# Altium PCB led_RGB_esp32_pcb.PcbDoc
Units mm, origin at the board's own origin, x right, y up, seen from the top; angles counter-clockwise.
Board outline 80 x 35 mm, 2 copper layers (Top Layer, Bottom Layer); 37 components, 28 nets, 176 pads, 53 vias.
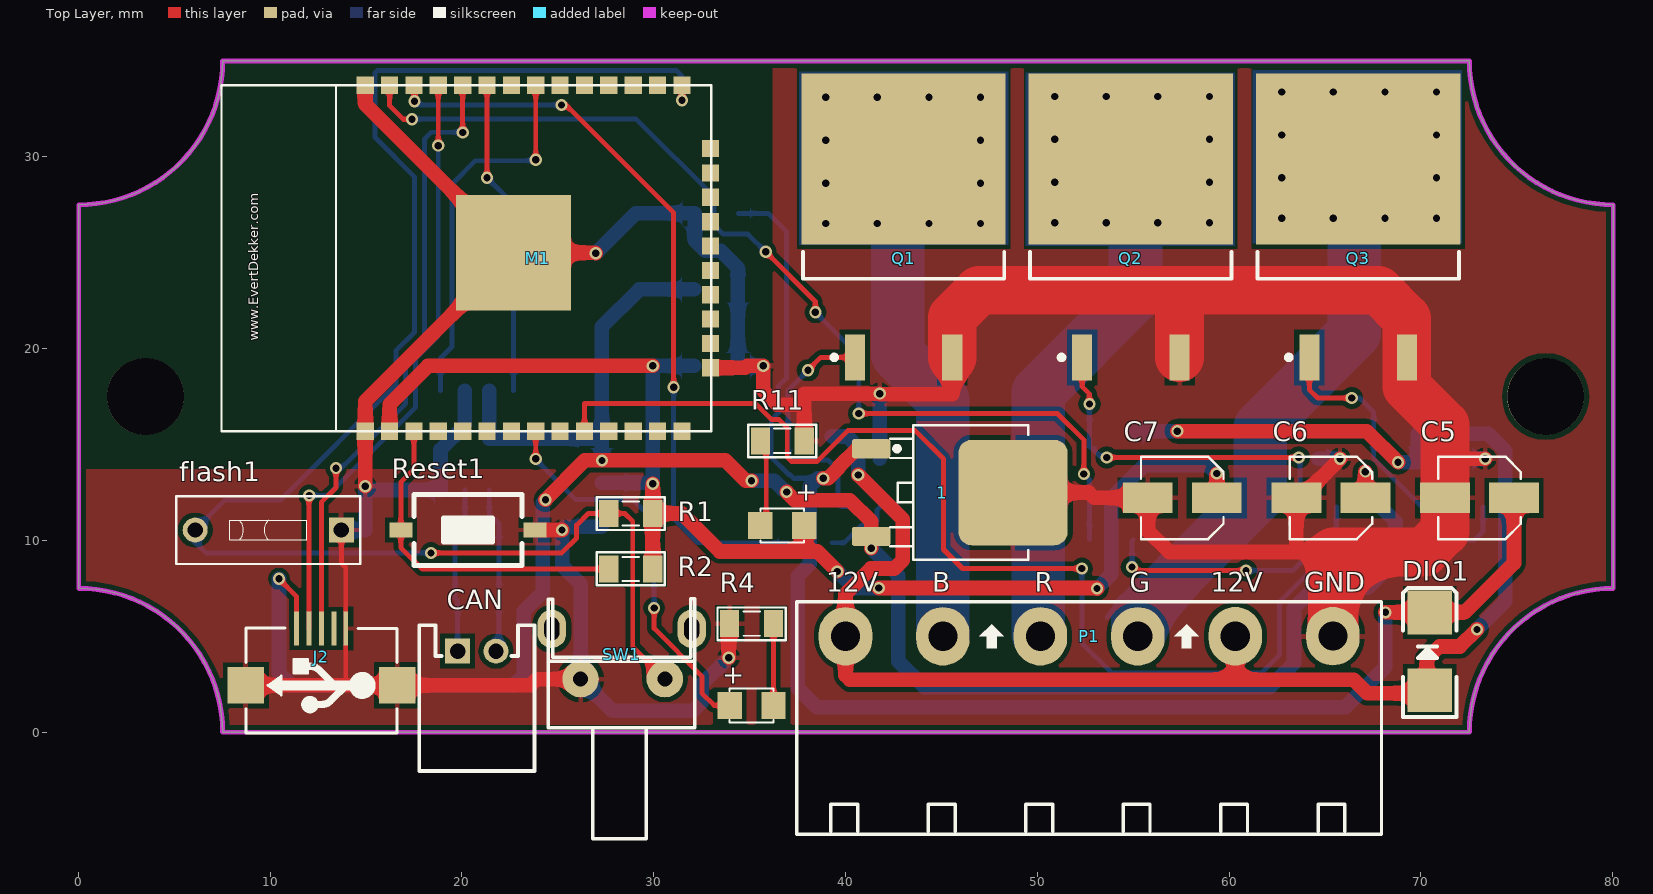
[diagram p0: Top Layer view]
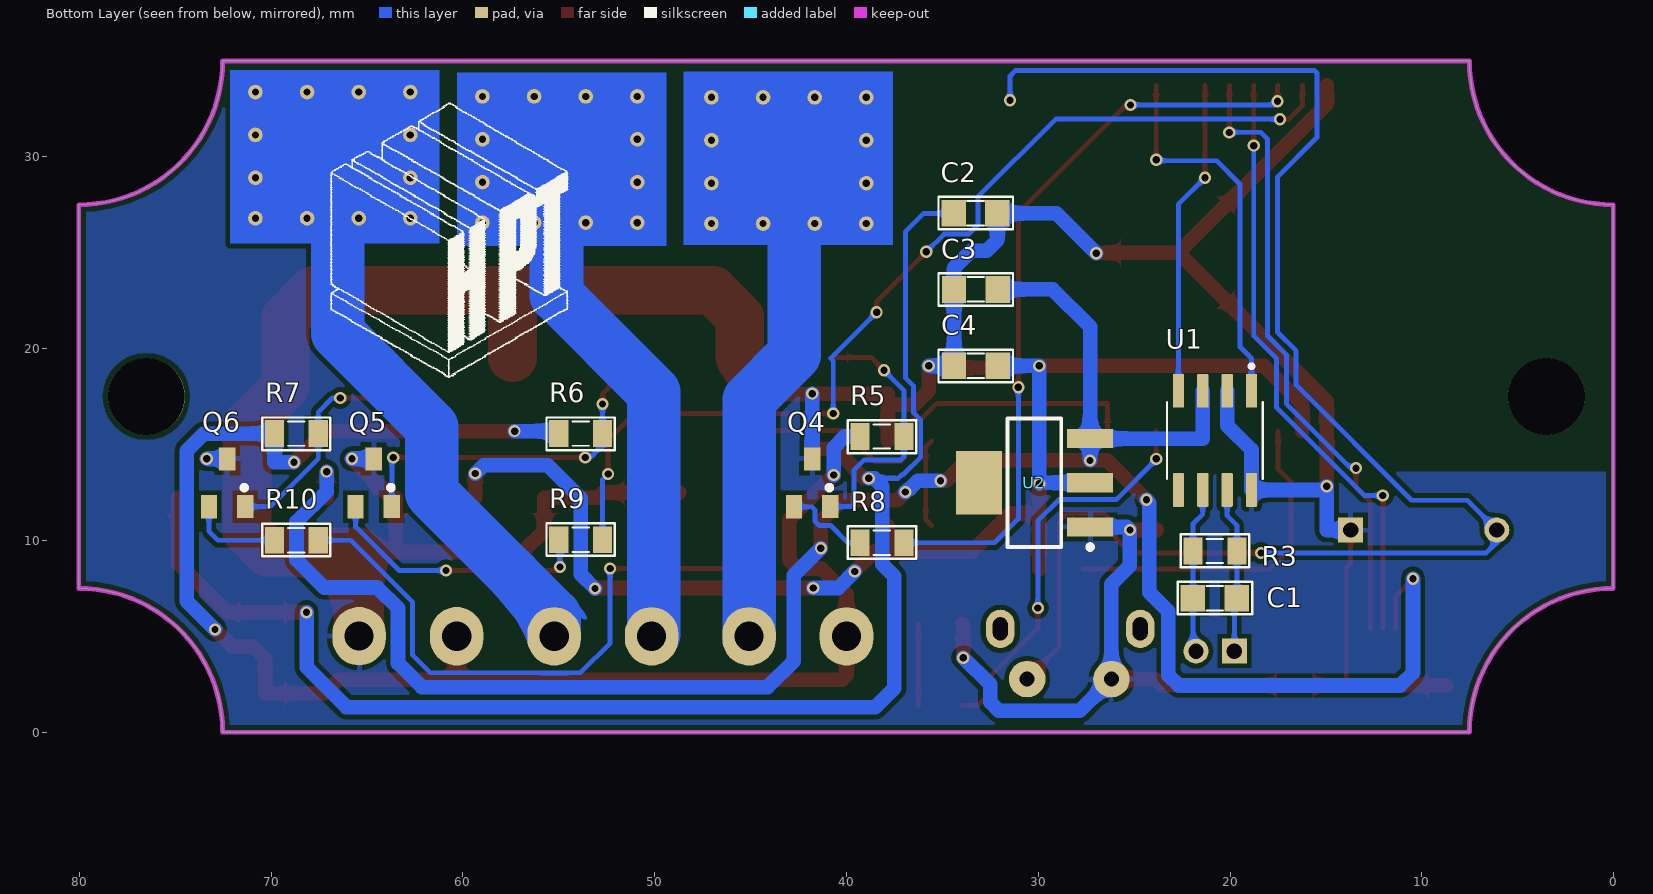
[diagram p1: Bottom Layer view, seen from below]

## Layer stack, top to bottom
Top Solder: solder mask 0.0102, Solder Resist, Dk 3.5
Top Layer: signal copper 0.0356
Dielectric 1: dielectric 0.32, FR-4, Dk 4.8
Bottom Layer: signal copper 0.0356
Bottom Solder: solder mask 0.0102, Solder Resist, Dk 3.5

## Board outline
0.025,7.5 0.025,27.5 ccw(c0.025,35) 7.525,35 72.525,35 ccw(c80.025,35) 80.025,27.5 80.025,7.5 ccw(c80.025,0) 72.525,0 7.525,0 ccw(c0.025,0)

## Design rules (kind name [scope] priority, off if disabled: settings)
Clearance [All] p1: gap=0.254
PolygonConnect [All] p1: connectstyle=Relief reliefconductorwidth=0.254 reliefentries=4 polygonreliefangle="90 Angle" airgapwidth=0.254
RoomDefinition led_RGB_esp32_schematic [InComponentClass('led_RGB_esp32_schematic')] p1: confinementstyle=ConfineIn formatcopy=TRUE lockcomponents=FALSE outline 82.372,-1.219 133.172,-1.219 133.172,24.181 82.372,24.181
RoutingVias [All] p1: holewidth=0.381 width=0.635 viastyle="Through Hole" minholewidth=0.381 minwidth=0.635 maxholewidth=0.711 maxwidth=1.27
SolderMaskExpansion [All] p1: expansion=0.102
Width [All] p1: maxlimit=3.048 minlimit=0.254 preferedwidth=0.254
30 further rules are at their usual default settings.

## Components (designator, comment, footprint, x,y, rotation, side; value= is the part's Value field where it differs from the comment)
1 "LM78xx" TO252-123 45.034,12.497 r270 top
+ "LED" LED-0805-Blue 33.96,1.397 r0 top (schematic designator LED1)
+ "LED" LED-0805-Blue 37.846,10.77 r180 top (schematic designator LED2)
C1 "104" SM-CAP-0805 19.66,6.985 r0 bottom
C2 "104" SM-CAP-0805 32.131,27.051 r0 bottom
C3 "104" SM-CAP-0805 34.392,23.089 r180 bottom
C4 "104" SM-CAP-0805 34.392,19.101 r180 bottom
C5 "CN-ALU-SMD" CAP-ALU-SMD-4.5x5x1.4 73.05,12.217 r180 top
C6 "CN-ALU-SMD" CAP-ALU-SMD-4.5x5x1.4 65.303,12.217 r180 top
C7 "CN-ALU-SMD" CAP-ALU-SMD-4.5x5x1.4 57.556,12.217 r180 top
CAN "62000211722" 62000211722 20.777,1.778 r0 top (schematic designator J1)
DIO1 "Diode SMD" DIO-SMD-106 70.46,4.216 r270 top
flash1 "SW" SW-DIP1-1 9.906,10.541 r90 top
J2 "USB-5" USB-M1 12.675,5.41 r180 top
M1 "ESP32S_Module" ESP32S 32.995,15.697 r90 top
P1 "Header 6" HED6T 40,5 r0 top
Q1 "IRF3709" D2PAK_N 43.028,26.34 r90 top
Q2 "IRF3709" D2PAK_N 54.877,26.34 r90 top
Q3 "IRF3709" D2PAK_N 66.726,26.34 r90 top
Q4 "A1015" SOT23B 41.783,13.005 r180 bottom
Q5 "A1015" SOT23B 64.643,13.005 r180 bottom
Q6 "A1015" SOT23B 72.289,13.005 r180 bottom
R1 "10K" RES-SMD-0805 28.804,11.405 r0 top
R2 "10K" RES-SMD-0805 28.804,8.509 r180 top
R3 "60R" RES-SMD-0805 20.79,9.449 r0 bottom
R4 "1K" RES-SMD-0805 35.103,5.664 r0 top
R5 "10K" RES-SMD-0805 38.151,15.418 r180 bottom
R6 "10K" RES-SMD-0805 53.861,15.57 r180 bottom
R7 "10K" RES-SMD-0805 68.682,15.57 r180 bottom
R8 "1K" RES-SMD-0805 38.151,9.881 r0 bottom
R9 "1K" RES-SMD-0805 53.861,10.033 r0 bottom
R10 "1K" RES-SMD-0805 68.682,10.008 r0 bottom
R11 "4K7" RES-SMD-0805 36.703,15.189 r0 top
Reset1 "SW" SW1-SMD 20.32,10.541 r0 top
SW1 "SW" SW2-D2 28.321,2.769 r0 top
U1 "TJA1040" SOIC127P600X175-8N 20.79,15.215 r270 bottom
U2 "LM1117-3.3V" SOT223 30.201,13.005 r90 bottom

## Footprints (in the part's own frame and the unit in brackets; to place one, negate y for a bottom-side part, rotate by r counter-clockwise, add the part's x,y. Pads: shape width x height; smd on the part's side, far side on the other; paste and mask are expansions set on the pad)
62000211722 [mm] "2.00mm Male Horizontal Shrouded Header, 2p"
  rect 1.3x1.3 hole 0.8: 1(-1,2.45)
  round 1.3 hole 0.8: 2(1,2.45)
  silkscreen extent -3,-3.8 3,3.8, body extent -3,-3.8 3,3.8, height 4.85
CAP-ALU-SMD-4.5x5x1.4 [mm]
  rect 2.6x1.6 smd: 1(-1.8,0) 2(1.8,0)
  silkscreen extent -2.15,-2.15 2.15,2.15, body extent -2.5,-2.15 2.5,2.15, height 5.45
D2PAK_N [mm] "D2-PAK, 4-Leads, Body 8.8x10.4mm, Pitch 2.54mm, Lead Span 15.1mm, IPC Medium Density"
  rect 2.4x1.05 smd: 1(-6.8,2.54) 3(-6.8,-2.54)
  rect 8.9x10.65 smd: 2(3.55,0)
  silkscreen extent -6.92,-5.25 -1.3,5.25, body extent -2.7,-5.28 6.3,5.28, height 4.69
DIO-SMD-106 [mil]
  rect 90x90.55 smd: 1(80,0) 2(-80,0)
  silkscreen extent -130,-55 135,55, body extent -99,-50 106,52, height 95
ESP32S [mm] "ESP32S-Module"
  rect 0.9x0.9 smd: 1(0,18.034) 2(0,16.764) 3(0,15.494) 4(0,14.224) 5(0,12.954) 6(0,11.684) 7(0,10.414) 8(0,9.144) 9(0,7.874) 10(0,6.604) 11(0,5.334) 12(0,4.064) 13(0,2.794) 14(0,1.524) 15(3.3,0.034) 16(4.57,0.034) 17(5.84,0.034) 18(7.11,0.034) 19(8.38,0.034) 20(9.65,0.034) 21(10.92,0.034) 22(12.19,0.034) 23(13.46,0.034) 24(14.73,0.034) 25(18.034,1.524) 26(18.034,2.794) 27(18.034,4.064) 28(18.034,5.334) 29(18.034,6.604) 30(18.034,7.874) 31(18.034,9.144) 32(18.034,10.414) 33(18.034,11.684) 34(18.034,12.954) 35(18.034,14.224) 36(18.034,15.494) 37(18.034,16.764) 38(18.034,18.034)
  rect 6x6 smd: 101(9.3,10.3)
  silkscreen extent 0,0 18.03,25.53, body extent 0,0 18.03,25.53, height 2
HED6T [mil] "Header 4, 4 pin, hight 300mil, Pin to Pin 200, Colour Green"
  oval 110x120 hole 60: 1(0,0) 2(200,0) 3(400.06,0.06) 4(600.06,0.06) 5(800.12,0.12) 6(1000.45,0.45)
  silkscreen extent -100,-406 1100,71, body extent -100,-406 1094,66, height 334
LED-0805-Blue [mil]
  rect 50x55 smd: 1(0,0) 2(90,0)
  silkscreen extent 0,-35 90,35, body extent 5,-25 85,25, height 43
RES-SMD-0805 [mil]
  rect 39.37x55 smd: 1(-45,0) 2(45,0)
  silkscreen extent -70,-34 70,33, body extent -39,-25 39,25, height 31
SM-CAP-0805 [mil]
  rect 50x55 smd: 1(0,0) 2(90,0)
  silkscreen extent -32,-34 121,33, body extent 6,-25 84,25, height 31
SOIC127P600X175-8N [mm]
  rrect15% 1.75x0.59 smd: 1(-2.585,1.905) 2(-2.585,0.635) 3(-2.585,-0.635) 4(-2.585,-1.905) 5(2.585,-1.905) 6(2.585,-0.635) 7(2.585,0.635) 8(2.585,1.905)
  silkscreen extent -3.97,-2.5 2,2.5
SOT23B [mm] "SOT 23B"
  rect 0.85x1.2 smd: 1(0.94,-1.245) 2(0,1.25) 3(-0.95,-1.25)
  silkscreen extent 0.77,-0.38 1.02,-0.13, body extent -1.5,-1.3 1.5,1.2, height 1.06
SOT223 [mm]
  rect 1x2.4 smd: 1(-2.3,-2.9) 2(0,-2.9) 3(2.3,-2.9)
  rect 3.3x2.4 smd: 4(0,2.9)
  silkscreen extent -3.47,-3.02 3.35,1.4, body extent -3.25,-3.56 3.25,3.4, height 1.68
SW1-SMD [mm]
  rect 1.2x0.8 smd: 1(-3.5,0) 2(3.5,0)
  silkscreen extent -2.82,-1.85 2.82,1.85, body extent -3.05,-1.85 3.05,1.85, height 2.5
SW2-D2 [mil] "SW button 2pin, 300x 300 x 250 mil"
  round 75 hole 31: 1(-84,0) 2(89,0)
  oval 59.06x78.74 hole 31 slot 47.24 at 90 deg: G1(-143,103) G2(144,103)
  silkscreen extent -150,-328 150,165, body extent -163,-327 167,163, height 290
SW-DIP1-1 [mm] "01p, 2.54mm Pitch, Horizontal, Box Type, THT, flat Actuator, red, without Tape, Tube"
  rect 1.3x1.3 hole 0.8: 1(0,-3.81)
  round 1.3 hole 0.8: 2(0,3.81)
  silkscreen extent -1.77,-4.8 1.77,4.8, body extent -1.77,-4.8 1.77,4.8, height 5.4
TO252-123 [mm]
  round 0.5 on Mech15: 0(0,0)
  rrect25% 1x2 smd: 1(-2.285,-3.7) 3(2.285,-3.7)
  rrect25% 5.5x5.7 smd: 2(0,3.7)
  silkscreen extent -3.5,-2.7 3.5,4.5, body extent -3.3,-3.95 3.3,5.76, height 2.31
USB-M1 [mil]
  rect 10x70 smd: 1(51.18,0) 2(25.59,0) 3(0,0) 4(-25.59,0) 5(-50,0)
  rect 74.8x74.8 smd: 5(-155.51,116.84) 5(155.51,116.84)
  silkscreen extent -155,-1 155,215, body extent -157,5 158,218, height 107

## Part data
1: "Positive Voltage Regulator"
+ +: library part "LED SMD"
C1 C2 C3 C4: library part CN
C5 C6 C7: "Polarized Capacitor (Axial)"
CAN: "WR-WTB 2.00mm Male Horizontal Shrouded Header, 2p"
DIO1: "Default Diode"
flash1 Reset1 SW1: library part SW2, "Switch button 2 pin"
M1: "Esp-32S"
P1: "Header, 6-Pin"
Q1 Q2 Q3: library part IRF540S, "HEXFET N-Channel Power MOSFET"
Q4 Q5 Q6: "PNP 600mW, ECB"
R1 R2 R3 R4 R5 R6 R7 R8 R9 R10 R11: library part Res-SMD, "Resistor"
U1: "1/1 Transceiver Half CANbus 8-SO"
U2: library part LM1117, "800mA Low-Dropout Linear Regulator"

## Free pads (board coordinates)
  round 4 hole 4: 40(3.5,17.5) 41(76.5,17.5)
  round 0.762 hole 0.381: 42(38.964,33.096) 42(50.902,33.147) 42(62.738,33.376) 43(41.656,33.096) 43(53.594,33.147) 43(65.43,33.376) 44(44.348,33.096) 44(56.286,33.147) 44(68.123,33.376) 45(47.041,33.096) 45(58.979,33.147) 45(70.815,33.376) 46(47.041,30.861) 46(58.979,30.912) 46(70.815,31.14) 47(47.041,28.626) 47(58.979,28.677) 47(70.815,28.905) 48(47.041,26.518) 48(58.979,26.568) 48(70.815,26.797) 49(44.348,26.518) 49(56.286,26.568) 49(68.123,26.797) 50(41.656,26.518) 50(53.594,26.568) 50(65.43,26.797) 51(38.964,26.518) 51(50.902,26.568) 51(62.738,26.797) 52(38.964,28.626) 52(50.902,28.677) 52(62.738,28.905) 53(38.964,30.861) 53(50.902,30.912) 53(62.738,31.14)

## Via types
v1: diameter 0.635, hole 0.381, Top Layer to Bottom Layer, tented both sides, 53 vias

## Nets (pads, with @x,y where several pads share a name; then routed paths per layer and width w, separated by ;. In a path a pad name is that pad's centre, name@x,y a point inside that pad or via, vN(x,y) a via of type N, cw(c..) or ccw(c..) an arc to the next point about the centre after c; other vN are vias at no path point)
3.3V: +.1@37.846,10.77 C4.2 C7.1 M1.2 R1.2 R2.1 U2.2 | length 70.2
  Top Layer w0.762: M1.2 16.231,17.096 18.235,19.101 v1(29.947,19.101) ; R2.1 R1.2 ; v1(29.947,12.954) R1.2 ; +.1@37.846,10.77 37.846,9.423 ; v1(39.573,8.382) 38.532,9.423 37.846,9.423 ; v1(41.732,7.518) 53.086,7.518 v1(53.111,7.493) ; C7.1 v1(59.356,13.484) ; R1.2 31.471,11.405 33.452,9.423 37.846,9.423
  Bottom Layer w0.762: U2.2 29.896,13.005 v1(29.947,12.954) v1(29.947,19.101) C4.2 ; v1(39.573,8.382) 40.437,7.518 v1(41.732,7.518) ; v1(53.111,7.493) 53.853,8.234 53.853,12.197 55.575,13.919 58.921,13.919 v1(59.356,13.484)
5V: 1.3 C3.2 C6.1 J2.1 U1.3 U2.3 | length 116.2
  Top Layer w0.254: v1(10.465,8.001) 11.375,7.091 J2.1
  Top Layer w0.762: v1(24.359,12.116) 26.412,14.17 v1(27.301,14.17) 33.735,14.17 34.798,13.106 v1(35.103,13.106) ; v1(36.932,12.522) 37.351,12.103 40.221,12.103 41.334,10.99 1.3 v1(41.334,9.593) ; C6.1 v1(67.103,13.586)
  Bottom Layer w0.762: v1(10.465,8.001) 10.465,3.099 11.125,2.438 22.682,2.438 23.216,2.972 23.216,6.299 24.206,7.29 24.206,11.963 v1(24.359,12.116) ; U1.3 21.425,15.305 U2.3 ; v1(27.301,14.17) U2.3 ; C3.2 29.261,23.089 27.301,21.128 U2.3 ; v1(35.103,13.106) 36.286,13.106 36.718,12.675 36.779,12.675 v1(36.932,12.522) ; v1(41.334,9.593) 42.748,8.179 42.748,3.708 44.12,2.337 54.187,2.337 54.189,2.335 56.294,2.335 56.296,2.337 59.27,2.337 ; 59.271,2.336 61.375,2.336 ; 61.376,2.337 62.128,2.337 63.38,3.588 63.38,6.458 64.465,7.544 67.234,7.544 68.674,8.984 68.674,10.969 67.103,12.539 v1(67.103,13.586)
12V: DIO1.1 P1.1 P1.5 R5.1 R6.1 R7.1 | length 86.3
  Top Layer w0.762: v1(40.665,13.411) 42.977,11.1 42.977,8.966 42.545,8.534 41.311,8.534 40,7.223 P1.1 40,2.977 40.234,2.743 60.323,2.743 ; v1(57.302,15.697) 67.183,15.697 v1(68.809,14.072) ; P1.5 60.323,2.743 ; v1(72.923,5.359) 72.034,4.47 70.968,4.47 70.307,3.81 70.307,2.032 67.208,2.032 66.497,2.743 60.323,2.743
  Bottom Layer w0.762: R5.1 40.081,15.418 40.665,14.834 v1(40.665,13.411) ; R6.1 55.131,15.697 v1(57.302,15.697) ; v1(68.809,14.072) 69.825,14.072 R7.1 73.508,15.57 74.397,14.681 74.397,6.833 v1(72.923,5.359)
GND: 1.2 C2.1 C3.1 C4.1 C5.2 C6.2 C7.2 flash1.1 J2.5 M1.1 M1.15 M1.38 M1.101 P1.6 Q1.3 Q2.3 Q3.3 Q4.2 Q5.2 Q6.2 R4.1 R11.2 Reset1.2 SW1.1 U1.2 U1.8 U2.1 | length 215.3
  Top Layer w0.254: flash1.1 13.716,8.814 13.945,8.585 13.945,5.41 13.945,2.468 13.919,2.442
  Top Layer w0.762: J2.5@8.725,2.442 13.919,2.442 16.625,2.442 23.575,2.442 23.902,2.769 SW1.1 ; v1(14.961,12.827) M1.1 14.961,17.263 M1.101 ; M1.38 14.961,32.731 M1.101 ; Reset1.2 v1(25.222,10.541) ; v1(26.975,24.968) 26.946,24.997 M1.101 ; M1.15 32.963,18.999 34.773,18.999 34.874,19.101 v1(35.712,19.101) 35.712,17.805 36.449,17.069 37.846,17.069 ; v1(33.909,3.886) 33.909,5.613 R4.1 ; R11.2 37.846,17.653 v1(41.783,17.653) 41.808,17.628 45.568,17.628 Q1.3 ; 1.2 52.68,12.497 52.959,12.217 C7.2 55.756,10.512 56.871,9.398 63.576,9.398 ; 65.412,9.398 63.576,9.398 ; v1(65.781,14.255) 63.743,12.217 C6.2 63.503,9.471 63.576,9.398 ; 71.25,14.224 71.281,14.255 v1(73.35,14.255)
  Top Layer w2.54: Q1.3 45.568,21.641 46.965,23.038 57.455,23.038 ; Q2.3 57.417,23 57.455,23.038 ; P1.6 65.412,9.398 70.18,9.398 71.25,10.468 C5.2 71.25,14.224 71.25,16.024 69.266,18.009 Q3.3 69.266,21.565 67.793,23.038 57.455,23.038
  Bottom Layer w0.762: flash1.1 14.961,10.541 v1(14.961,12.827) 15.158,12.63 U1.8 18.885,14.719 20.155,15.989 U1.2 ; v1(26.975,24.968) 29.058,27.051 C2.1 32.131,25.654 32.69,25.095 33.503,25.095 34.392,24.206 C3.1 C4.1 v1(35.712,19.101) ; U2.1 25.386,10.705 v1(25.222,10.541) 25.222,8.687 26.187,7.722 SW1.1 27.839,1.118 32.055,1.118 32.512,1.575 32.512,2.489 v1(33.909,3.886) ; Q4.2 v1(41.783,17.653) ; Q5.2 v1(65.781,14.255) ; Q6.2 v1(73.35,14.255)
LEDB: M1.36 R8.1 | length 39.3
  Top Layer w0.254: M1.36 17.526,33.706 v1(17.526,32.893) ; v1(25.197,32.702) 25.413,32.702 31.039,27.076 v1(31.039,17.983)
  Bottom Layer w0.254: v1(17.526,32.893) 17.501,32.868 17.666,32.702 v1(25.197,32.702) ; v1(31.039,17.983) 31.039,11.125 32.283,9.881 R8.1
LEDG: M1.10 R10.1 | length 60.2
  Top Layer w0.254: M1.10 26.391,17.145 35.295,17.145 36.133,16.307 36.525,16.307 36.965,15.867 36.965,14.333 37.188,14.11 38.504,14.11 40.117,15.723 43.637,15.723 45.11,14.249 45.11,9.525 46.101,8.534 v1(52.324,8.534)
  Bottom Layer w0.254: v1(52.324,8.534) 52.324,4.648 53.873,3.099 54.503,3.099 54.505,3.097 55.978,3.097 55.98,3.099 59.586,3.099 ; 59.587,3.098 61.06,3.098 ; 61.06,3.099 61.697,3.099 62.618,4.02 62.618,6.774 65.851,10.008 R10.1
LEDR: M1.37 R9.1 | length 52.9
  Top Layer w0.254: M1.37 16.231,32.664 16.942,31.953 v1(17.399,31.953) ; v1(35.839,25.044) 38.43,22.454 v1(38.43,21.895) ; v1(40.691,16.612) 51.054,16.612 52.426,15.24 v1(52.426,13.462)
  Bottom Layer w0.254: v1(17.399,31.953) 17.412,31.966 29.088,31.966 33.147,27.907 33.147,26.449 33.624,25.971 34.912,25.971 v1(35.839,25.044) ; v1(38.43,21.895) 40.831,19.494 40.691,19.355 v1(40.691,16.612) ; v1(52.426,13.462) 52.718,13.17 R9.1
Net1_1: 1.1 C2.2 C5.1 DIO1.2 | length 78.9
  Top Layer w0.762: v1(38.837,13.233) 39.091,13.233 39.649,13.792 39.649,13.832 40.599,14.782 1.1 ; v1(68.148,6.248) DIO1.2 72.288,6.248 74.85,8.81 C5.1
  Bottom Layer w0.254: C2.2 35.966,27.051 36.932,26.086 36.932,18.473 36.5,18.041 36.5,16.647 36.127,16.274 36.127,14.343 37.033,13.437 37.095,13.437 37.298,13.233 v1(38.837,13.233)
  Bottom Layer w0.762: v1(38.837,13.233) 38.557,13.233 38.143,12.819 38.143,8.755 37.516,8.128 37.516,2.286 38.506,1.295 66.065,1.295 68.148,3.378 v1(68.148,6.248)
NetC1_1: C1.1 CAN.1 R3.1 U1.7 | length 8.7
  Bottom Layer w0.254: CAN.1 19.777,6.867 C1.1 19.647,6.998 R3.1 19.647,10.782 20.155,11.29 U1.7
NetC1_2: C1.2 CAN.2 R3.2 U1.6 | length 8.7
  Bottom Layer w0.254: U1.6 21.425,11.367 21.933,10.859 R3.2 21.933,4.384 CAN.2
Netflash1_2: flash1.2 M1.25 R1.1 SW1.2 | length 83.4
  Top Layer w0.254: v1(18.39,9.347) 25.208,9.347 25.984,10.124 25.984,10.795 26.594,11.405 R1.1 28.499,11.405 28.905,10.998 28.905,4.445 SW1.2 ; v1(31.471,32.944) M1.25
  Bottom Layer w0.254: v1(18.39,9.347) 6.655,9.347 6.096,9.906 flash1.2 7.645,12.09 10.541,12.09 16.561,18.11 16.561,19.888 17.539,20.866 17.539,28.943 15.469,31.013 15.469,34.366 15.594,34.492 31.191,34.492 31.471,34.213 v1(31.471,32.944)
NetLED1_1: +.1@33.96,1.397 M1.8 | length 20.7
  Top Layer w0.254: v1(23.851,14.249) M1.8 ; v1(30.023,6.477) 30.023,5.41 32.512,2.921 32.512,2.032 33.147,1.397 +.1@33.96,1.397
  Bottom Layer w0.254: v1(23.851,14.249) 23.851,14.216 25.943,12.124 28.923,12.124 30.023,11.024 v1(30.023,6.477)
NetLED1_2: +.2@36.246,1.397 R4.2 | length 4.3
  Top Layer w0.254: +.2@36.246,1.397 R4.2
NetLED2_2: +.2@35.56,10.77 R11.1 | length 4.7
  Top Layer w0.254: +.2@35.56,10.77 35.865,11.074 35.865,14.884 R11.1
NetM1_3: M1.3 R2.2 Reset1.1 | length 17.7
  Top Layer w0.254: M1.3 17.501,13.716 16.82,13.035 Reset1.1 16.82,9.621 17.932,8.509 R2.2
NetP1_2: P1.2 pad.42@38.964,33.096 pad.43@41.656,33.096 pad.44@44.348,33.096 pad.45@47.041,33.096 pad.46@47.041,30.861 pad.47@47.041,28.626 pad.48@47.041,26.518 pad.49@44.348,26.518 pad.50@41.656,26.518 pad.51@38.964,26.518 pad.52@38.964,28.626 pad.53@38.964,30.861 Q1.2 | length 26.5
  Bottom Layer w2.794: 42.723,30.505 42.723,19.685 45.08,17.328 P1.2
NetP1_3: P1.3 pad.42@50.902,33.147 pad.43@53.594,33.147 pad.44@56.286,33.147 pad.45@58.979,33.147 pad.46@58.979,30.912 pad.47@58.979,28.677 pad.48@58.979,26.568 pad.49@56.286,26.568 pad.50@53.594,26.568 pad.51@50.902,26.568 pad.52@50.902,28.677 pad.53@50.902,30.912 Q2.2 | length 27.1
  Bottom Layer w2.794: P1.3 50.059,5.104 50.059,17.725 55.118,22.784 55.118,29.997
NetP1_4: P1.4 pad.42@62.738,33.376 pad.43@65.43,33.376 pad.44@68.123,33.376 pad.45@70.815,33.376 pad.46@70.815,31.14 pad.47@70.815,28.905 pad.48@70.815,26.797 pad.49@68.123,26.797 pad.50@65.43,26.797 pad.51@62.738,26.797 pad.52@62.738,28.905 pad.53@62.738,31.14 Q3.2 | length 30.3
  Bottom Layer w2.794: P1.4 55.242,6.093 61.627,12.478 61.627,15.907 66.523,20.803 66.523,30.607
NetQ1_1: Q1.1 Q4.1 R5.2 | length 13.6
  Top Layer w0.254: v1(38.049,18.872) 38.717,19.54 Q1.1
  Bottom Layer w0.254: v1(38.049,18.872) 37.008,17.831 R5.2 37.008,14.351 37.16,14.199 39.076,14.199 39.599,13.676 39.599,11.938 39.776,11.76 Q4.1
NetQ2_1: Q2.1 Q5.1 R6.2 | length 18.5
  Top Layer w0.254: Q2.1 52.337,18.021 52.718,17.64 v1(52.718,17.107) ; v1(53.619,14.326) v1(63.627,14.326)
  Bottom Layer w0.254: v1(52.718,17.107) R6.2 52.718,14.948 53.34,14.326 v1(53.619,14.326) ; v1(63.627,14.326) 63.703,14.249 Q5.1
NetQ3_1: Q3.1 Q6.1 R7.2 | length 12.8
  Top Layer w0.254: Q3.1 64.186,17.856 64.618,17.424 v1(66.396,17.424)
  Bottom Layer w0.254: v1(66.396,17.424) 66.802,17.424 67.539,16.688 R7.2 67.539,14.264 70.042,11.76 Q6.1
NetQ4_3: Q4.3 R8.2 | length 4.6
  Bottom Layer w0.254: R8.2 39.929,9.881 40.827,10.779 41.426,10.779 41.649,11.002 41.649,11.601 41.803,11.755 Q4.3
NetQ5_3: Q5.3 R9.2 | length 14.2
  Top Layer w0.254: v1(54.94,8.611) 55.118,8.433 v1(60.884,8.433)
  Bottom Layer w0.254: v1(54.94,8.611) 54.94,9.97 R9.2 ; v1(60.884,8.433) 63.322,8.433 65.593,10.704 Q5.3
NetQ6_3: Q6.3 R10.2 | length 4.9
  Bottom Layer w0.254: R10.2 72.771,10.008 73.239,10.475 Q6.3
RX: J2.2 M1.35 | length 31.8
  Top Layer w0.254: J2.2 12.025,12.329 v1(12.04,12.344) ; v1(18.771,30.582) M1.35
  Bottom Layer w0.254: v1@11.887,12.344 13.005,12.344 17.577,16.916 17.577,19.467 18.771,20.661 v1(18.771,30.582)
RXCAN: M1.33 U1.4 | length 16.5
  Top Layer w0.254: v1(21.311,28.905) M1.33
  Bottom Layer w0.254: v1(21.311,28.905) 22.695,27.521 U1.4
TX: J2.3 M1.34 | length 32.5
  Top Layer w0.254: J2.3 12.675,11.992 13.437,12.754 v1(13.437,13.767) ; v1(20.041,31.267) M1.34
  Bottom Layer w0.254: v1(13.437,13.767) 13.709,13.767 17.069,17.127 17.069,19.678 18.047,20.656 18.047,30.924 18.402,31.28 20.028,31.28 v1(20.041,31.267)
TXCAN: M1.31 U1.1 | length 19.8
  Top Layer w0.254: v1(23.851,29.845) M1.31
  Bottom Layer w0.254: U1.1 18.885,19.494 19.482,20.091 19.482,28.575 20.701,29.794 23.8,29.794 v1(23.851,29.845)
pads on no net: 1.0 J2.4 M1.4 M1.5 M1.6 M1.7 M1.9 M1.11 M1.12 M1.13 M1.14 M1.16 M1.17 M1.18 M1.19 M1.20 M1.21 M1.22 M1.23 M1.24 M1.26 M1.27 M1.28 M1.29 M1.30 M1.32 SW1.G1 SW1.G2 U1.5 U2.4

## Polygon pours and split planes (outlines as drawn)
GND on Top Layer "Top Layer-No Net" (solid, remove dead copper, pour order 2): 0.025,7.5 0.025,13.716 36.195,13.716 36.195,35 72.525,35 80.025,27.5 80.025,27.432 80.025,7.5 72.525,0 7.525,0
GND on Bottom Layer "Top Layer-No Net" (solid, remove dead copper, pour order 4): 0.025,7.5 0.025,13.589 35.585,13.589 35.585,35 72.525,35 80.025,35 80.025,7.5 80.025,0 7.525,0

## Keep-outs
Keep-Out Layer:
  the board outline again, w0.254

## Other copper
Bottom Layer:
  rectangle net NetP1_2: 37.567,25.4 48.489,34.442
  rectangle net NetP1_3: 49.378,25.349 60.3,34.392
  rectangle net NetP1_4: 61.214,25.476 72.136,34.519

## Silkscreen, mask and mechanical layers (free items; w line width, h text height)
Top Overlay:
  text "12V" at 38.989,7.315 h1.02
  text "B" at 44.526,7.315 h1.02
  text "R" at 49.86,7.315 h1.02
  text "G" at 54.813,7.315 h1.02
  text "12V" at 59.03,7.315 h1.02
  text "GND" at 63.906,7.315 h1.02
Bottom Overlay:
  drawing of 2330 lines, arcs and shapes, not listed

## Text inside footprints (layer, text, board x,y; h text height)
M1: Top Overlay "www.EvertDekker.com" at 9.373,20.396 h0.5 r90